# EAGLE board badge1 (EAGLE 7.3.0)

Size 50 x 43.75 mm. Coordinates in mm from the lower left corner, seen from the top.
Outline: 0,37.5 3.12,37.5 3.12,40.62 6.25,40.62 6.25,43.75 18.75,43.75 18.75,40.62 21.88,40.62 21.88,37.5 28.12,37.5 28.12,40.62 31.25,40.62 31.25,43.75 43.75,43.75 43.75,40.62 46.88,40.62 46.88,37.5 50,37.5 50,25 46.88,25 46.88,18.75 43.75,18.75 43.75,15.62 40.62,15.62 40.62,12.5 37.5,12.5 37.5,9.38 34.38,9.38 34.38,6.25 31.25,6.25 31.25,3.12 28.12,3.12 28.12,0 21.88,0 21.88,3.12 18.75,3.12 18.75,6.25 15.62,6.25 15.62,9.38 12.5,9.38 12.5,12.5 9.38,12.5 9.38,15.62 6.25,15.62 6.25,18.75 3.12,18.75 3.12,25 0,25 0,37.5
Copper layers (1*16): Top 0.035mm / dielectric 1.5mm / Bottom 0.035mm
Design rules "dirt_cheap_dirty_boards.v1": minimum track width 5mil, minimum drill 12mil, track to track 5mil, track to pad 5mil, pad to pad 5mil, via to via 5mil, smd to smd 0mil, copper to edge 10mil, drill to drill 10mil, minimum pad ring 10mil, minimum via ring 6mil, stop-mask expansion 2mil, vias tented up to drill 25mil, thermal gap 10mil

## Footprints (pad centres in the part's own frame; a part is rotated, then mirrored left to right if it is on the bottom)
LED2-2.54-D5.0MM = drill 0.889 pad 1.651 square: + -1.27,0 | drill 0.889 pad 1.651: - 1.27,0
SW6-2.54-9.0X3.5X3.2MM-90D = drill 0.813 pad 1.27: CH1A -2.54,-1.65; CH1B 2.54,-1.65; CH2A -2.54,1.65; CH2B 2.54,1.65 | drill 0.813 pad 1.27 octagon: COM1 0,-1.65; COM2 0,1.65
3,81/1,4 = drill 1.397 pad 3.81 octagon: 1 0,0
BAT2P-13.5-CR1220 = drill 0.635 pad 1.524 long: +1 6.731,0; +2 -6.731,0 | smd 7.62 x 7.62: - 0,0
AXIAL-0.4 = drill 0.9 pad 1.88: P$1 -5.08,0; P$2 5.08,0
1X03_LOCK = drill 1.016 pad 1.88: 1 0,0.127; 2 2.54,-0.127; 3 5.08,0.127

## Placement (x,y rotation side)
1  [LED2-2.54-D5.0MM]  7.72,27.9 90 top
2  [LED2-2.54-D5.0MM]  42.75,27.94 90 top
3  [SW6-2.54-9.0X3.5X3.2MM-90D]  25.03,6.34 0 top
4  [3,81/1,4]  25.03,33.66 0 top
5  cr1220  [BAT2P-13.5-CR1220]  25.1,18.6 180 top
20150914  [AXIAL-0.4]  15.24,29.89 270 top
GEEKPRT  [1X03_LOCK]  10.16,40.43 0 top
RD@IIS.SE  [AXIAL-0.4]  12.7,29.89 270 top

## Library data of the parts
1 2 = Discrete-new
3 = Seeed-OPL-Switch
4 = wirepad
5 = Seeed-OPL-Connector
20150914 RD@IIS.SE = SparkFun-Passives
GEEKPRT = SparkFun-Connectors

## Nets
GND: 1.- 2.- 5.- GEEKPRT.1
N$1: 1.+ 3.COM2
N$2: 2.+ 3.COM1
N$3: 3.CH1A 3.CH2A 5.+1 5.+2
N$4: GEEKPRT.2 RD@IIS.SE.P$1
N$5: 3.CH1B 20150914.P$2
N$6: 3.CH2B RD@IIS.SE.P$2
N$7: 20150914.P$1 GEEKPRT.3

## Tracks (layer width: path | path; a pad name or v marks a point on that pad's centre or on a via)
GND  (3 unrouted)
N$1  (1 unrouted)
N$2  (1 unrouted)
N$3  (3 unrouted)
N$4  (1 unrouted)
N$5  (1 unrouted)
N$6  (1 unrouted)
N$7  (1 unrouted)